# Altium PCB DevCard.PcbDoc
Units mm, origin at the board's own origin, x right, y up, seen from the top; angles counter-clockwise.
Board outline 85.6 x 53.98 mm, 4 copper layers (Top Layer 1, Layer 2, Layer 3, Bottom Layer 4), stack 1.586 mm thick; 4 components, 3 nets, 14 pads, 0 vias.
Unrouted connection lines stored in the file: 3.
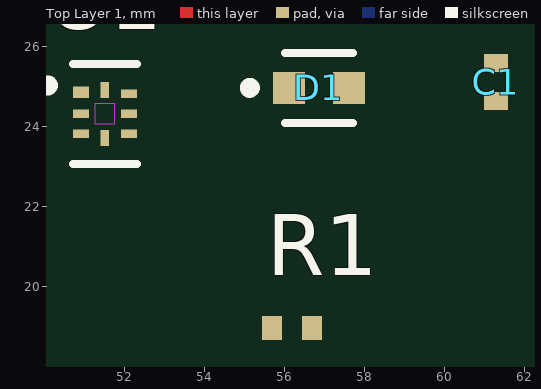
[diagram p0: Top Layer 1 view]
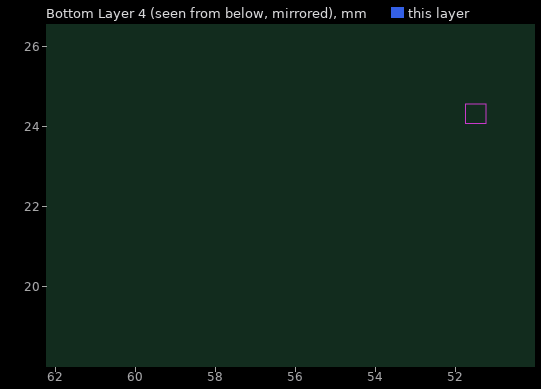
[diagram p1: Bottom Layer 4 view, seen from below]

## Layer stack, top to bottom
Top Solder: solder mask 0.03, Solder Resist, Dk 3.8
Top Layer 1: signal copper 0.035
Prepreg 1: prepreg 0.2104, 7628*1, Dk 4.4
Layer 2: signal copper 0.0152
Core: dielectric 1.065, Core, Dk 4.6
Layer 3: signal copper 0.0152
Prepreg 2: prepreg 0.2104, 7628*1, Dk 4.4
Bottom Layer 4: signal copper 0.035
Bottom Solder: solder mask 0.03, Solder Resist, Dk 3.8

## Board outline
3.18,0 cw(c3.18,3.18) 0,3.18 0,50.8 cw(c3.18,50.8) 3.18,53.98 82.42,53.98 cw(c82.42,50.8) 85.6,50.8 85.6,3.18 cw(c82.42,3.18) 82.42,0

## Design rules (kind name [scope] priority, off if disabled: settings)
BoardOutlineClearance [All] p1: gap=0.2 ignorepadtopadclearanceinfootprint=FALSE
Clearance [All] p1: gap=0.102 ignorepadtopadclearanceinfootprint=FALSE except(0.127: Arc-Via Track-Via SMDPad-Via THPad-Via Via-Via Via-Fill Via-Poly Via-Region Via-Text; 0.25: Arc-Hole Track-Hole SMDPad-Hole THPad-Hole Via-Hole Fill-Hole Poly-Hole Region-Hole Text-Hole) ismatrix=TRUE
ComponentClearance [All] p1: gap=0.102 collisioncheckmode=3 verticalgap=0.102 showdistances=TRUE
DiffPairsRouting [All] p1: maxlimit=0.102 minlimit=0.102 mostfreqgap=0.102 toplayer_minwidth=0.102 toplayer_maxwidth=1816.048 toplayer_prefwidth=0.102 midlayer1_minwidth=0.102 midlayer1_maxwidth=1816.048 midlayer1_prefwidth=0.102 midlayer2_minwidth=0.102 midlayer2_maxwidth=1816.048 midlayer2_prefwidth=0.102 bottomlayer_minwidth=0.102 bottomlayer_maxwidth=1816.048 bottomlayer_prefwidth=0.102 maxuncoupledlength=12.7
FanoutControl FanoutControl_1 [All] p1: bgadir=Out bgaviamode=Closest fanoutstyle=Auto fanoutdirection=None viagrid=0.025
FanoutControl Fanout_BGA [IsBGA] p2: bgadir=Out bgaviamode=Centered fanoutstyle=Auto fanoutdirection=Alternating viagrid=0.025 // Fanout_BGA (Default Rule)
FanoutControl Fanout_LCC [IsLCC] p3: bgadir=Out bgaviamode=Centered fanoutstyle=Auto fanoutdirection=Alternating viagrid=0.025 // Fanout_LCC (Default Rule)
FanoutControl Fanout_SOIC [IsSOIC] p4: bgadir=Out bgaviamode=Centered fanoutstyle=Auto fanoutdirection=Alternating viagrid=0.025 // Fanout_SOIC (Default Rule)
FanoutControl Fanout_Small [(CompPinCount < 5)] p5: bgadir=Out bgaviamode=Centered fanoutstyle=Auto fanoutdirection=OutThenIn viagrid=0.025 // Fanout_Small (Default Rule)
FanoutControl Fanout_Default [All] p6: bgadir=Out bgaviamode=Centered fanoutstyle=Auto fanoutdirection=Alternating viagrid=0.025 // Fanout_Default (Default Rule)
Height [All] p1: minheight=0 maxheight=1816.048 prefheight=12.7
HoleSize [All] p1: absolutevalues=TRUE maxlimit=6.3 minlimit=0.2 maxpercent=80.000 minpercent=20.000
HoleToHoleClearance [All] p1: gap=0.25 allowstackedmicrovias=FALSE
MinimumAnnularRing [All] p1: minimumring=0.076
MinimumSolderMaskSliver [All] p1: minsoldermaskwidth=0
PlaneClearance [All] p1: clearance=0.102
PlaneConnect PlaneConnectPowerPads [InPadClass('PowerPads')] p1: planeconnectstyle=Direct reliefexpansion=0.508 reliefentries=4 reliefconductorwidth=0.254 reliefairgap=0.254
PlaneConnect [All] p2: pad.planeconnectstyle=Relief pad.reliefexpansion=0.3 pad.reliefentries=4 pad.reliefconductorwidth=0.102 pad.reliefairgap=0.102 via.planeconnectstyle=Direct via.reliefexpansion=0.3 via.reliefentries=4 via.reliefconductorwidth=0.127 via.reliefairgap=0.127
PolygonConnect PolygonConnectPowerPads [All vs (InPadClass('PowerPads'))] p1: connectstyle=Direct reliefconductorwidth=0.254 reliefentries=4 polygonreliefangle="90 Angle" airgapwidth=0.254
PolygonConnect [All] p2: thpad.connectstyle=Relief thpad.reliefconductorwidth=0.102 thpad.reliefentries=4 thpad.polygonreliefangle="90 Angle" thpad.airgapwidth=0.102 smdpad.connectstyle=Relief smdpad.reliefconductorwidth=0.102 smdpad.reliefentries=4 smdpad.polygonreliefangle="90 Angle" smdpad.airgapwidth=0.102 via.connectstyle=Direct via.reliefconductorwidth=0.127 via.reliefentries=4 via.polygonreliefangle="90 Angle" via.airgapwidth=0.127
RoutingVias [All] p1: holewidth=0.2 width=0.45 viastyle="Through Hole" minholewidth=0.2 minwidth=0.45 maxholewidth=6.3 maxwidth=6.55
SilkToSilkClearance [All] p1: silktosilkclearance=0
SilkToSolderMaskClearance [IsPad] p1: minsilkscreentomaskgap=0.102 clearancetoexposedcopper=TRUE
SolderMaskExpansion [All] p1: expansion=0.05 istentingtop=FALSE
Width [All] p1: maxlimit=1816.048 minlimit=0.102 preferedwidth=0.102
15 further rules are at their usual default settings.

## Components (designator, comment, footprint, x,y, rotation, side; value= is the part's Value field where it differs from the comment)
C1 "GRM155R71C224KA12D" GRM155-0402-MFG 61.275,25.125 r270 top
D1 "LTST-C190KGKT" FP-LTST-C190KGKT-MFG 56.85,24.975 r0 top
R1 "RC0402FR-0762RL" RC0402-MFG 56.175,18.975 r180 top
U1 "NT3H2211W0FHKH" FP-SOT902-3-MFG 51.5,24.325 r0 top

## Footprints (in the part's own frame and the unit in brackets; to place one, negate y for a bottom-side part, rotate by r counter-clockwise, add the part's x,y. Pads: shape width x height; smd on the part's side, far side on the other; paste and mask are expansions set on the pad)
FP-LTST-C190KGKT-MFG [mm]
  rect 0.8x0.8 smd paste+0 mask+0: 1(-0.75,0) 2(0.75,0)
  silkscreen extent -1.85,-0.87 0.85,0.87, body extent -1.25,-0.55 1.25,0.55, height 0.25
FP-SOT902-3-MFG [mm]
  rect 0.4x0.295 smd paste-1000 mask-1000: 1(-0.6,0.537)
  rect 0.4x0.22 smd paste-1000 mask-1000: 2(-0.6,0) 3(-0.6,-0.5) 5(0.6,-0.5) 6(0.6,0) 7(0.6,0.5)
  rect 0.22x0.4 smd paste-1000 mask-1000: 4(0,-0.6) 8(0,0.6)
  Keep-Out Layer region: -0.25,-0.25 0.25,-0.25 0.25,0.25 -0.25,0.25
  silkscreen extent -1.55,-1.25 0.8,1.25, body extent -0.95,-0.95 0.95,0.95, height 0.25
GRM155-0402-MFG [mm]
  rect 0.45x0.6 smd: 1(-0.475,0) 2(0.475,0)
  body extent -0.8,-0.45 0.8,0.45, height 0.25
RC0402-MFG [mm]
  rect 0.5x0.6 smd: 1(-0.5,0) 2(0.5,0)
  body extent -0.85,-0.4 0.85,0.4, height 0.25

## Part data
C1: "220nF 0402 Multilayer Ceramic Capacitor", Capacitance=220nF, LCSC Part Number=C77011, Manufacturer Part Number=GRM155R71C224KA12D
D1: "LED Emerald 2V 0603", Color=Green, Forward Voltage=2V, LCSC Part Number=C125094, Manufacturer Part Number=LTST-C190KGKT
R1: "62Ω 0402 Chip Resistor", LCSC Part Number=C274896, Resistance=62Ω, Manufacturer Part Number=RC0402FR-0762RL
U1: library part CMP-10146-000001-1, "IC RFID TRANSP 13.56MHZ 8XQFN", Frequency=13.56MHz, Max Operating Temperature=105°C, Min Operating Temperature=-40°C, Interface=I2C, Lead Free="Lead Free", Packaging="Tape and Reel"

## Nets (pads, with @x,y where several pads share a name; then routed paths per layer and width w, separated by ;. In a path a pad name is that pad's centre, name@x,y a point inside that pad or via, vN(x,y) a via of type N, cw(c..) or ccw(c..) an arc to the next point about the centre after c; other vN are vias at no path point)
NetC1_1: C1.1 D1.2
NetC1_2: C1.2 R1.1
NetD1_1: D1.1 R1.2
pads on no net: U1.1 U1.2 U1.3 U1.4 U1.5 U1.6 U1.7 U1.8

## Silkscreen, mask and mechanical layers (free items; w line width, h text height)
Mechanical 1:
  the board outline again, w0.15

## Dimensions
0,50.8 to 85.6,50.8 on Mechanical 1
0,0 to 3.18,53.98 on Mechanical 1